# Altium PCB DataAcquisitonBoard.PcbDoc
Units mm, origin at the board's own origin, x right, y up, seen from the top; angles counter-clockwise.
Board outline 100 x 100 mm, 2 copper layers (Top Layer, Bottom Layer); 73 components, 56 nets, 233 pads, 66 vias.
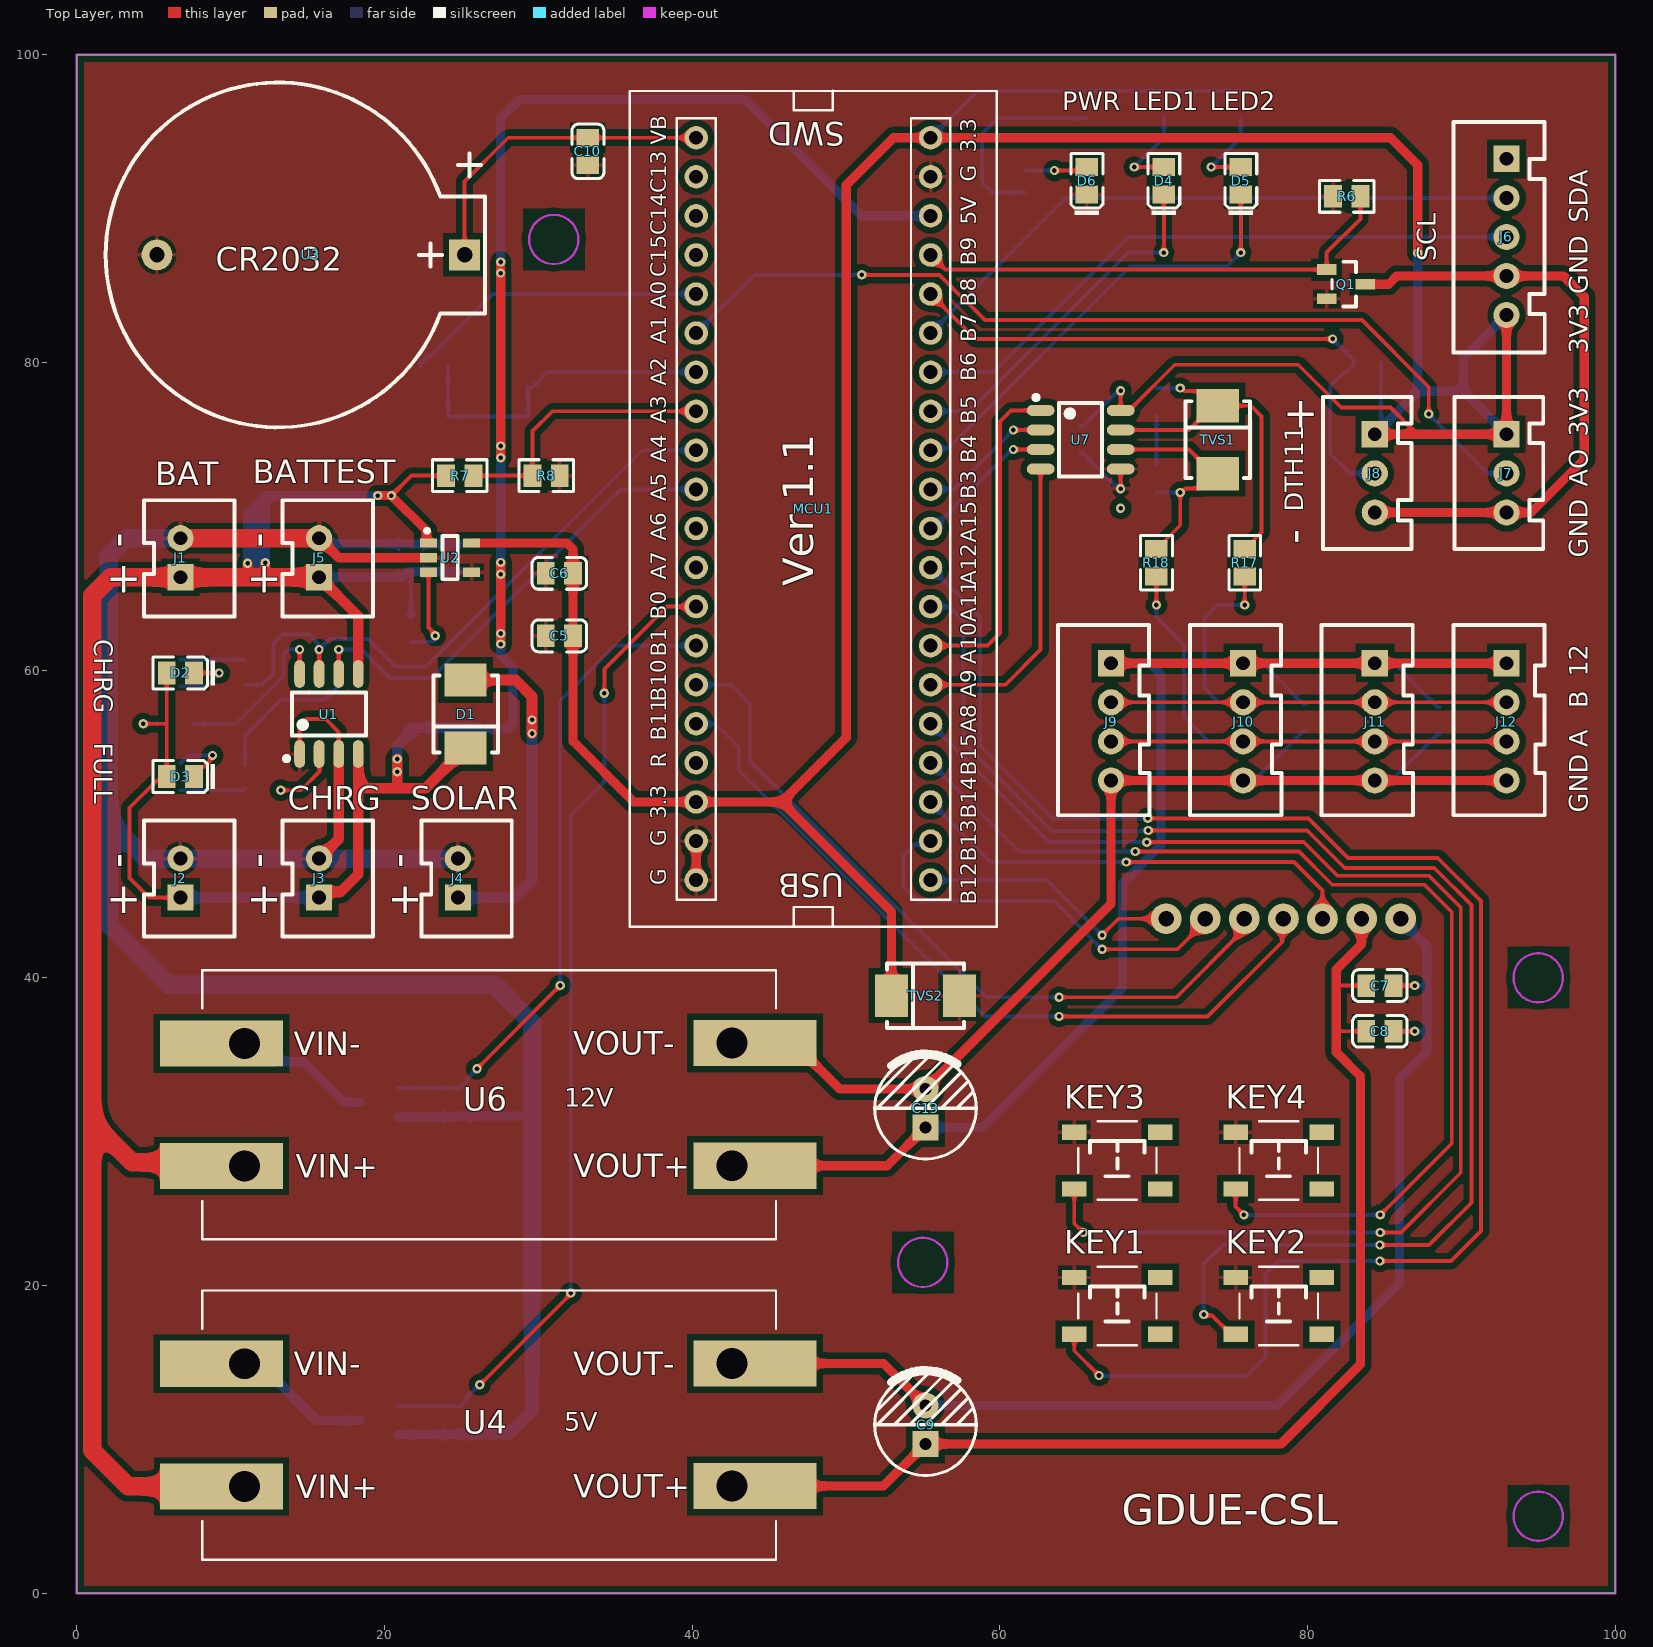
[diagram p0: Top Layer view]
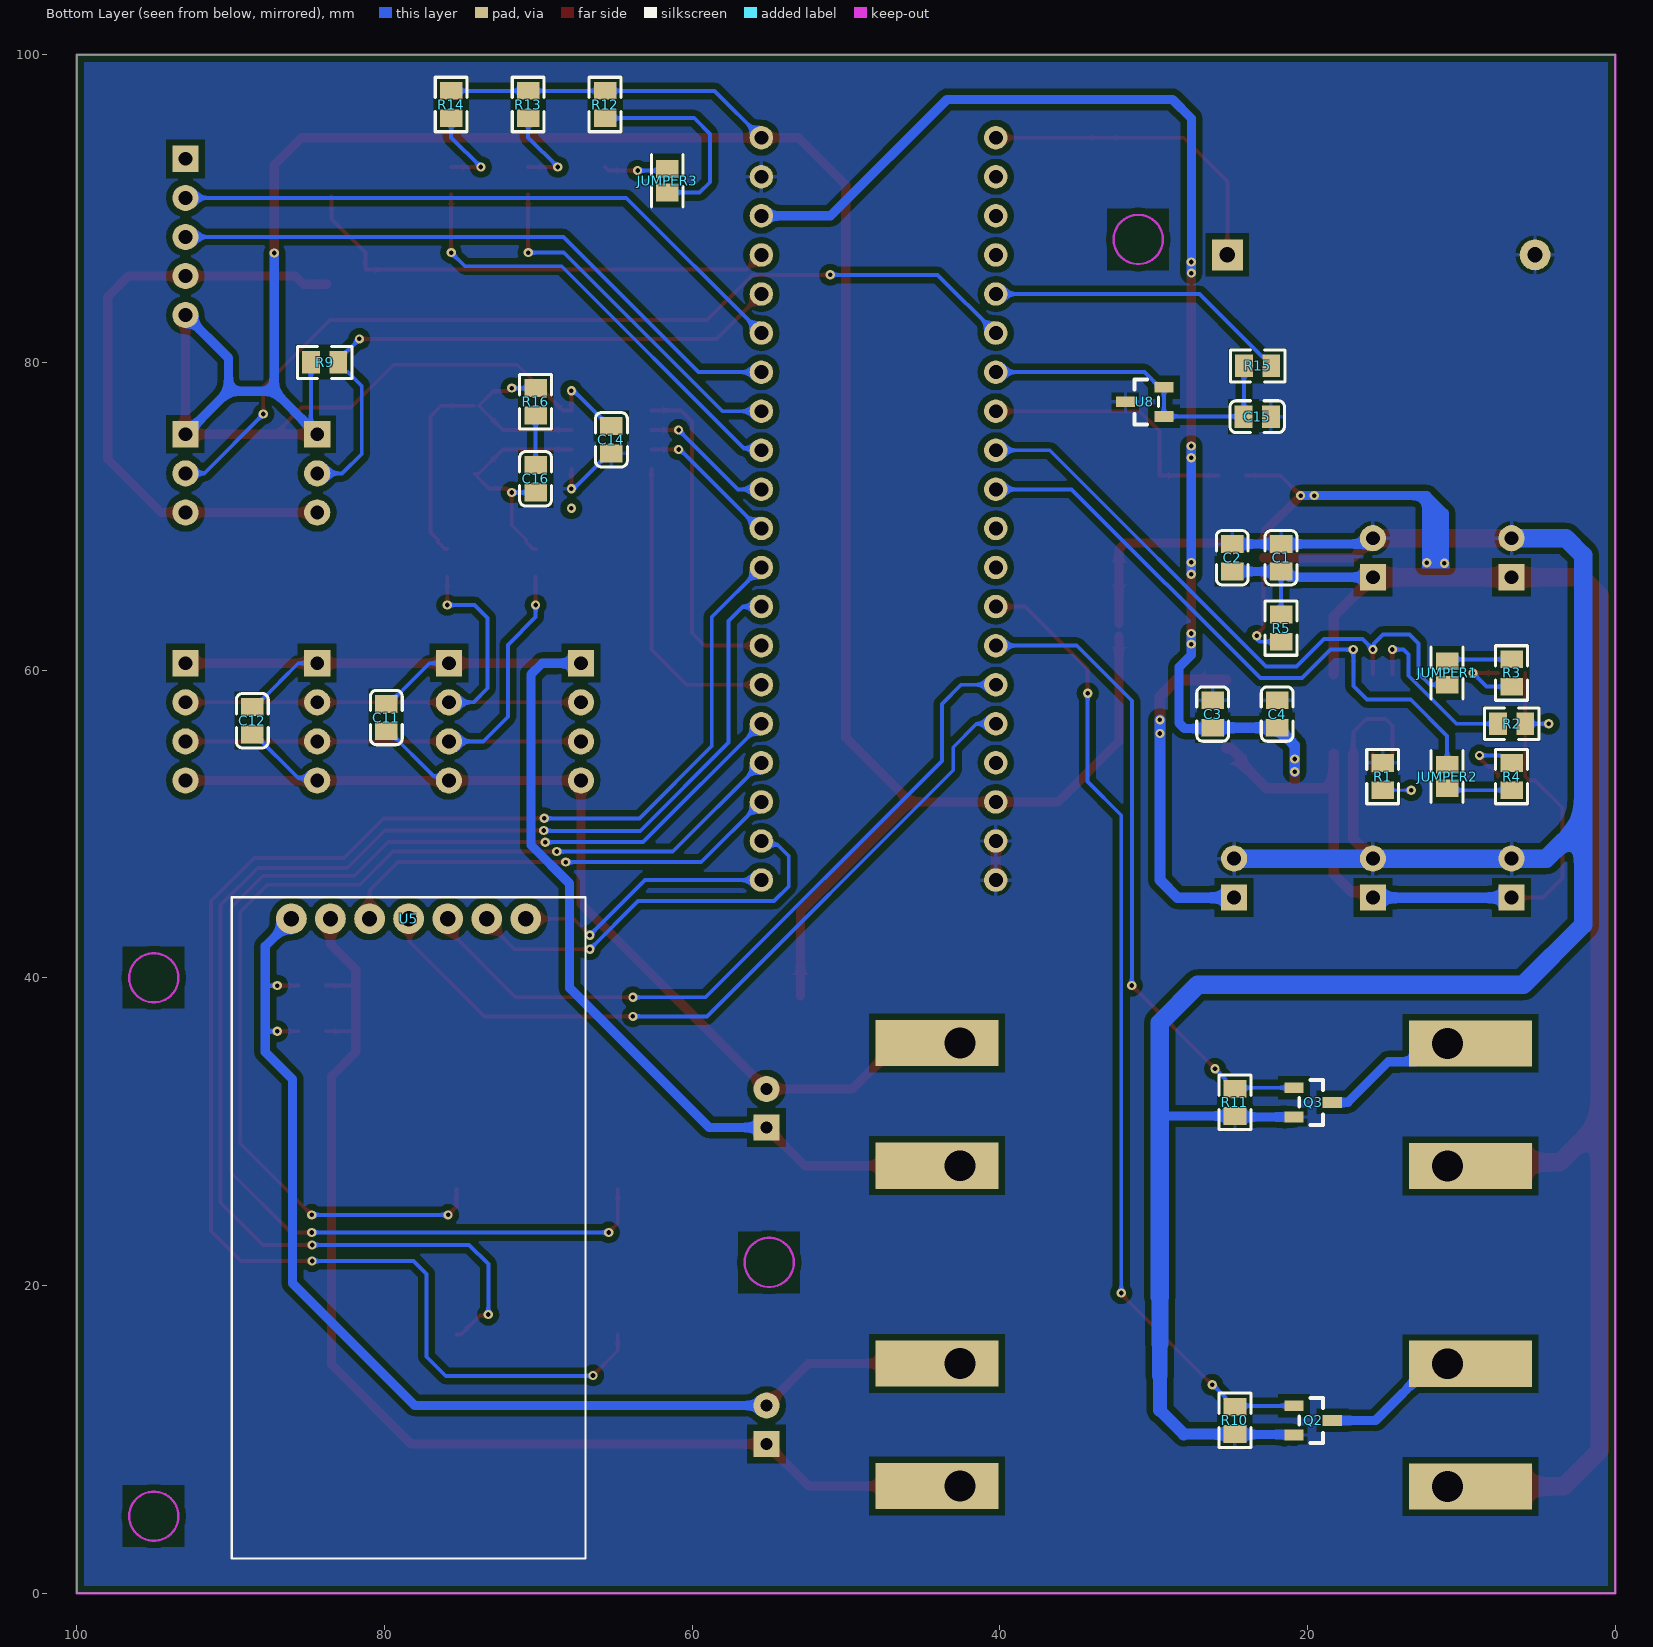
[diagram p1: Bottom Layer view, seen from below]
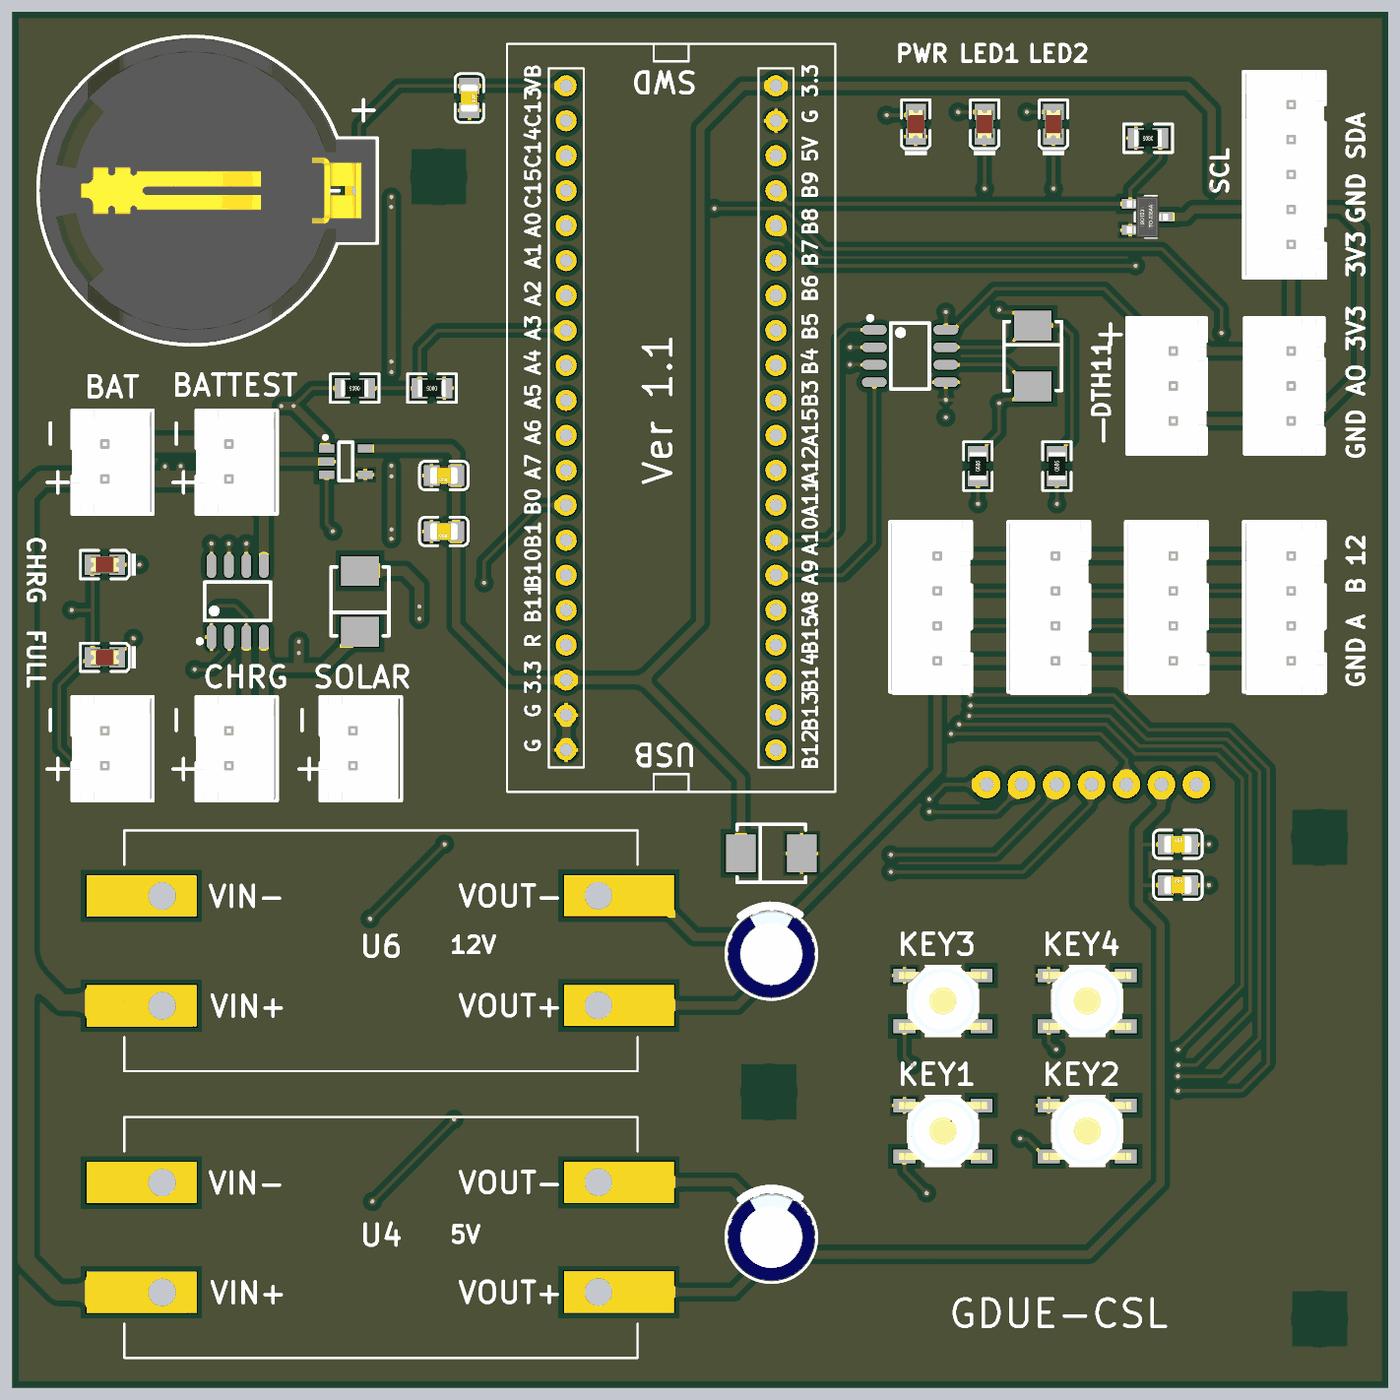
[diagram p2: 3D render of the assembled board from above, using the file's embedded part models]
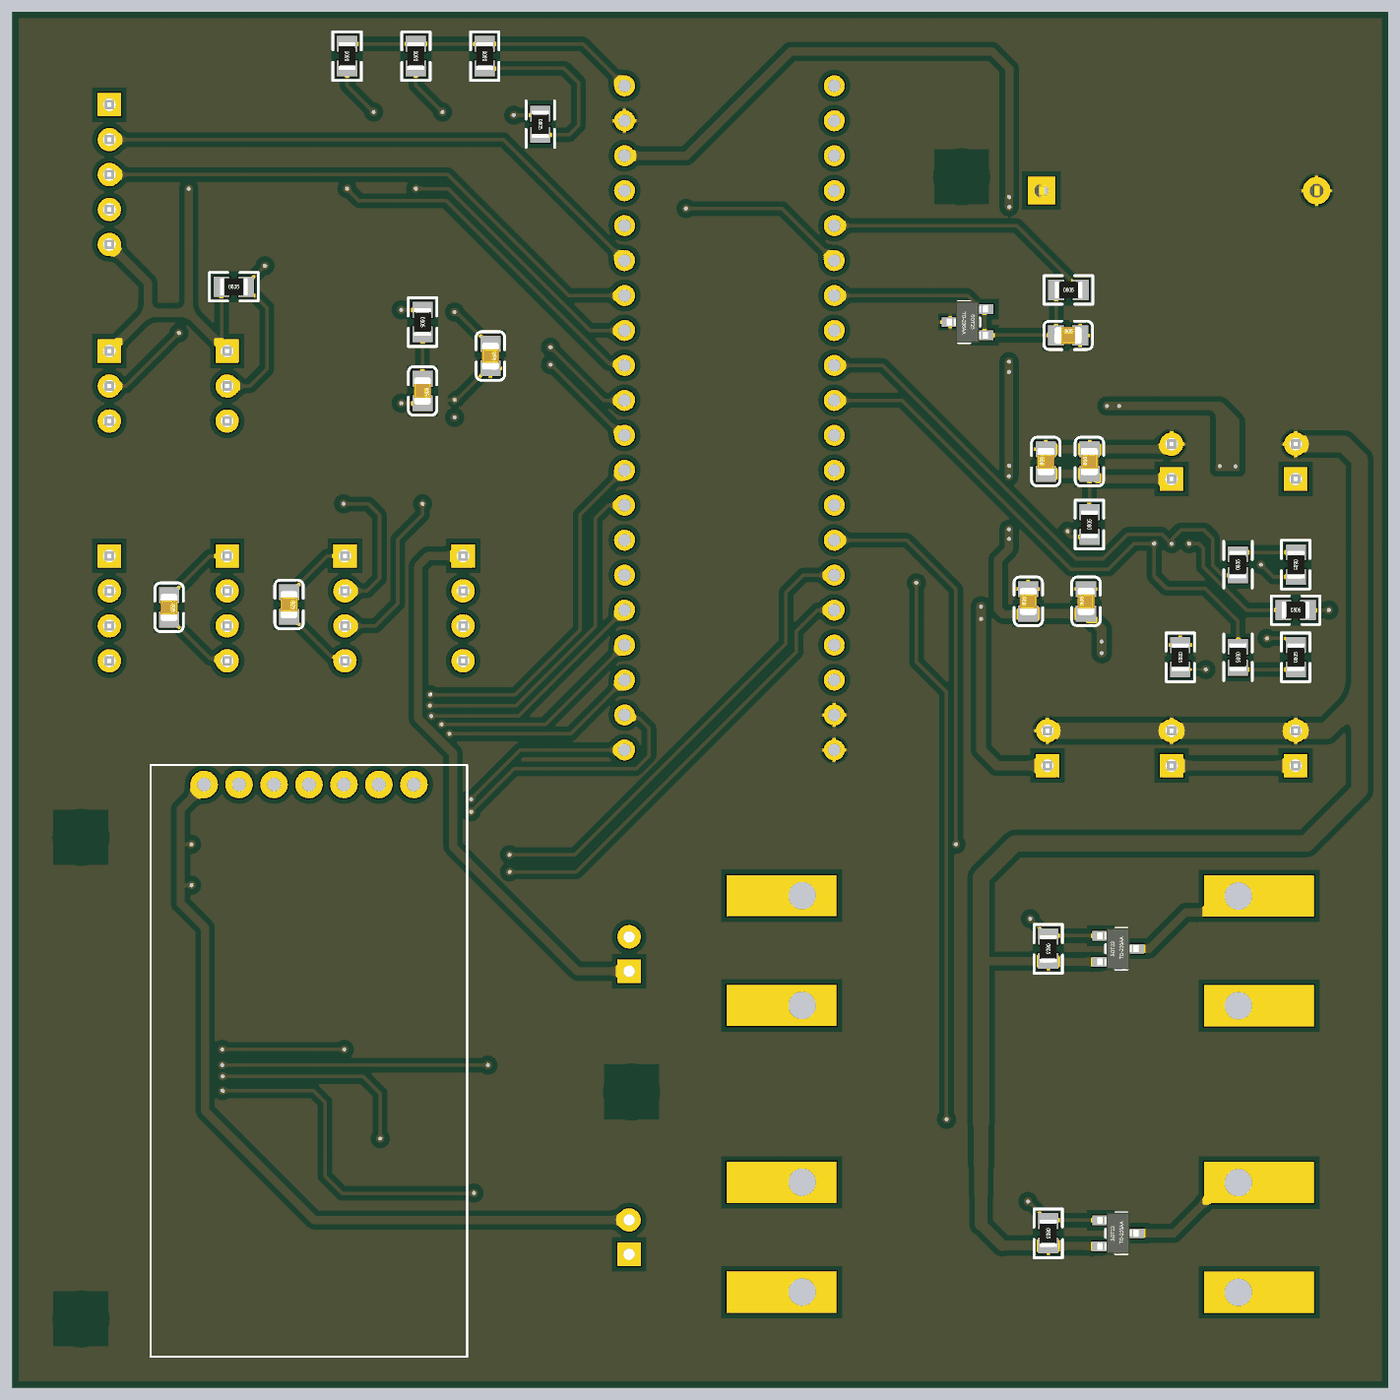
[diagram p3: 3D render of the assembled board from below, using the file's embedded part models]

## Layer stack, top to bottom
Top Solder: solder mask 0.0102, Solder Resist, Dk 3.5
Top Layer: signal copper 0.0356
Dielectric 1: dielectric 0.32, FR-4, Dk 4.8
Bottom Layer: signal copper 0.0356
Bottom Solder: solder mask 0.0102, Solder Resist, Dk 3.5

## Board outline
0,0 100,0 100,100 0,100

## Design rules (kind name [scope] priority, off if disabled: settings)
BoardOutlineClearance [All] p1: gap=0.4 ignorepadtopadclearanceinfootprint=FALSE
Clearance PolyClearance [InPolygon] p1: gap=0.4 ignorepadtopadclearanceinfootprint=FALSE
Clearance [All] p2: gap=0.152 ignorepadtopadclearanceinfootprint=FALSE
Height [All] p1: minheight=0 maxheight=50 prefheight=12.7
HoleSize [All] p1: absolutevalues=TRUE maxlimit=6.35 minlimit=0.3 maxpercent=80.000 minpercent=20.000
HoleToHoleClearance [All] p1: gap=0.152 allowstackedmicrovias=TRUE
MinimumSolderMaskSliver MinimumSolderMaskSliver_SOT23-5 [HasFootprint('SOT-23-5')] p1: minsoldermaskwidth=0
MinimumSolderMaskSliver [All] p2: minsoldermaskwidth=0.152
PolygonConnect [All] p1: connectstyle=Relief reliefconductorwidth=0.254 reliefentries=4 polygonreliefangle="90 Angle" airgapwidth=0.254
RoutingVias [All] p1: holewidth=0.3 width=0.6 viastyle="Through Hole" minholewidth=0.3 minwidth=0.6 maxholewidth=3 maxwidth=5
SilkToSilkClearance [All] p1: silktosilkclearance=0
SilkToSolderMaskClearance [IsPad] p1: minsilkscreentomaskgap=0 clearancetoexposedcopper=TRUE
SolderMaskExpansion [All] p1: expansion=0.102
Width [All] p1: maxlimit=5 minlimit=0.152 preferedwidth=0.152
24 further rules are at their usual default settings.

## Components (designator, comment, footprint, x,y, rotation, side; value= is the part's Value field where it differs from the comment)
C1 "22u" 0805_C 21.717,67.31 r90 bottom
C2 "104" 0805_C 24.892,67.31 r90 bottom
C3 "22u" 0805_C 26.162,57.15 r90 bottom
C4 "104" 0805_C 21.971,57.15 r90 bottom
C5 "22u" 0805_C 31.369,62.23 r180 top
C6 "104" 0805_C 31.369,66.294 r180 top
C7 "0805,103" 0805_C 84.709,39.497 r0 top
C8 "0805,104" 0805_C 84.709,36.525 r0 top
C9 "100u" "CAP 2.5*6.3*11.2" 55.169,10.947 r90 top
C10 "0805,104" 0805_C 33.223,93.726 r270 top
C11 "0805,103" 0805_C 79.883,56.921 r270 bottom
C12 "0805,104" 0805_C 88.595,56.718 r270 bottom
C13 "100u" "CAP 2.5*6.3*11.2" 55.169,31.521 r90 top
C14 "0805,104" 0805_C 65.253,74.981 r270 bottom
C15 "0805,104" 0805_C 23.266,76.479 r180 bottom
C16 "0805,48n" 0805_C 70.18,72.441 r270 bottom
D1 "SS24" SMB(DO-214AA)_S1 25.273,57.15 r90 top
D2 "" 0805_LED_S1 6.731,59.817 r180 top
D3 "" 0805_LED_S1 6.731,53.086 r180 top
D4 "0805" 0805_LED_S1 70.663,91.821 r90 top
D5 "0805" 0805_LED_S1 75.667,91.821 r90 top
D6 "0805" 0805_LED_S1 65.659,91.821 r90 top
J1 "电池接口" XH2.54-LI-2P 6.731,67.31 r90 top
J2 "DC JACK" XH2.54-LI-2P 6.731,46.482 r90 top
J3 "DC JACK" XH2.54-LI-2P 15.748,46.482 r90 top
J4 "DC JACK" XH2.54-LI-2P 24.765,46.482 r90 top
J5 "电池测试接口" XH2.54-LI-2P 15.748,67.31 r90 top
J6 "TSL2561" XH2.54-LI-5P 92.939,88.163 r270 top
J7 "土壤湿度传感器" XH2.54-LI-3P 92.939,72.796 r270 top
J8 "DTH11" XH2.54-LI-3P 84.379,72.796 r270 top
J9 "12V_SENSOR" XH2.54-LI-4P 67.234,56.642 r270 top
J10 "12V_SENSOR" XH2.54-LI-4P 75.819,56.642 r270 top
J11 "12V_SENSOR" XH2.54-LI-4P 84.379,56.642 r270 top
J12 "12V_SENSOR" XH2.54-LI-4P 92.939,56.642 r270 top
JUMPER1 "0805_JUMPER" JUMPER 10.922,59.817 r90 bottom
JUMPER2 "0805_JUMPER" JUMPER 10.922,53.086 r270 bottom
JUMPER3 "0805_JUMPER" JUMPER 61.62,91.821 r270 bottom
KEY1 "KEY" "TSW SMD-4*4*1.5" 67.64,18.669 r0 top
KEY2 "KEY" "TSW SMD-4*4*1.5" 78.13,18.669 r0 top
KEY3 "KEY" "TSW SMD-4*4*1.5" 67.64,28.118 r0 top
KEY4 "KEY" "TSW SMD-4*4*1.5" 78.13,28.118 r0 top
MCU1 "市售的MCU核心板" STM32F103C8T6_CORE 47.879,70.485 r90 top
Q1 "AO3400" SOT-23(SOT-23-3) 82.499,85.09 r180 top
Q2 "AO3400" SOT-23(SOT-23-3) 19.634,11.227 r0 bottom
Q3 "AO3400" SOT-23(SOT-23-3) 19.634,31.902 r0 bottom
R1 "0805,1.1k" 0805_R 15.113,53.086 r270 bottom
R2 "0805,500k" 0805_R 6.731,56.515 r180 bottom
R3 "0805,1k" 0805_R 6.731,59.817 r270 bottom
R4 "0805,1k" 0805_R 6.731,53.086 r90 bottom
R5 "0805,100K" 0805_R 21.717,62.738 r90 bottom
R6 "0805,10K" 0805_R 82.55,90.805 r180 top
R7 "0805,50K" 0805_R 24.891,72.644 r180 top
R8 "0805,50K" 0805_R 30.505,72.644 r180 top
R9 "0805,5K" 0805_R 83.896,80.01 r180 bottom
R10 "0805,10K" 0805_R 24.714,11.227 r270 bottom
R11 "0805,10K" 0805_R 24.714,31.902 r270 bottom
R12 "0805,1k" 0805_R 65.659,96.774 r90 bottom
R13 "0805,1k" 0805_R 70.663,96.774 r90 bottom
R14 "0805,1k" 0805_R 75.667,96.774 r90 bottom
R15 "0805,330" 0805_R 23.24,79.781 r180 bottom
R16 "0805,120" 0805_R 70.18,77.445 r270 bottom
R17 "0805,10" 0805_R 75.921,66.98 r90 top
R18 "0805,10" 0805_R 70.18,66.98 r90 top
TVS1 "SMBJ10CA" SMB(DO-214AA)_S1 74.168,74.981 r270 top
TVS2 "SMBJ5.0A" SMB(DO-214AA)_S1 55.169,38.837 r0 top
U1 "TP4056X" SOIC-8_150mil 16.383,57.15 r0 top
U2 "TPS78233" SOT-23-5 24.257,67.31 r180 top
U3 "CR2302" CR2032_A 13.081,86.995 r0 top
U4 "DCDC_BOOST" BOOSTER 26.797,10.922 r0 top
U5 "AS32TTL1W" LORA 78.435,23.749 r270 bottom
U6 "DCDC_BOOST" BOOSTER 26.797,31.75 r0 top
U7 "MAX3485" SOIC-8_150mil 65.253,74.981 r270 top
U8 "TL431" SOT-23(SOT-23-3) 30.582,77.445 r180 bottom

## Footprints (in the part's own frame and the unit in brackets; to place one, negate y for a bottom-side part, rotate by r counter-clockwise, add the part's x,y. Pads: shape width x height; smd on the part's side, far side on the other; paste and mask are expansions set on the pad)
0805_C [mm]
  rect 1.16x1.47 smd: 1(-0.89,0) 2(0.89,0)
  silkscreen extent -1.77,-1.04 1.77,1.04, body extent -1,-0.63 1,0.62, height 0.77
0805_LED_S1 [mm]
  rect 1.16x1.47 smd: A(0.89,0) K(-0.89,0)
  silkscreen extent -2.25,-1.04 1.77,1.03, body extent -1.01,-0.62 1.01,0.62, height 1.1
0805_R [mm]
  rect 1.16x1.47 smd: 1(-0.89,0) 2(0.89,0)
  silkscreen extent -1.77,-1.04 1.77,1.03, body extent -1,-0.63 1,0.62, height 0.49
BOOSTER [mm] "DCDC升压模块"
  rect 8x3 hole 2 copper offset -1.5,0: 1(-15.9,3.988) 2(-15.9,-3.988)
  rect 8x3 hole 2 copper offset 1.5,0: 3(15.799,-3.962) 4(15.799,4.013)
  silkscreen extent -18.65,-8.75 18.65,8.75
"CAP 2.5*6.3*11.2" [mm] "脚距2.5mm直径6.3mm高度11.2mm"
  rect 1.7x1.7 hole 0.8: 1(-1.25,0)
  round 1.7 hole 0.8: 2(1.25,0)
  silkscreen extent -3.3,-3.3 3.56,3.3, body extent -3.15,-3.15 3.16,3.15, height 11.23
CR2032_A [mm] "纽扣电池座"
  rect 2x2 hole 1: 1(12.126,0)
  round 2 hole 1: 2(-7.874,0)
  silkscreen extent -11.21,-11.21 13.46,11.21, body extent -11.1,-11.1 13.3,11.1, height 8.75
JUMPER [mm]
  rect 1.16x1.47 smd: 1(-0.762,0) 2(0.762,0)
  silkscreen extent -1.69,-1.04 1.69,1.03, body extent -1,-0.63 1,0.62, height 0.49
LORA [mm] "AS32-TTL-1W"
  round 2 hole 1: 1(-20.091,7.62) 2(-20.091,5.08) 3(-20.091,2.54) 4(-20.091,0) 5(-20.091,-2.54) 6(-20.091,-5.08) 7(-20.091,-7.62)
  silkscreen extent -21.5,-11.5 21.5,11.5
SMB(DO-214AA)_S1 [mm]
  rect 2.159x2.743 smd: 1(2.21,0) 2(-2.21,0)
  silkscreen extent -2.5,-2.1 2.5,2.1
SOIC-8_150mil [mm]
  oval 0.7x1.8 smd: 1(-1.905,-2.6) 2(-0.635,-2.6) 3(0.635,-2.6) 4(1.905,-2.6) 5(1.905,2.6) 6(0.635,2.6) 7(-0.635,2.6) 8(-1.905,2.6)
  silkscreen extent -2.9,-3.05 2.4,1.4
SOT-23(SOT-23-3) [mm]
  rect 1.25x0.7 smd: 1(1.25,-0.95) 2(1.25,0.95) 3(-1.25,0)
  silkscreen extent -0.65,-1.46 0.9,1.46, body extent -1.5,-1.5 1.5,1.5, height 1.3
SOT-23-5 [mm]
  rect 1.1x0.6 smd: 1(1.4,-0.95) 2(1.4,0) 3(1.4,0.95) 4(-1.4,0.95) 5(-1.4,-0.95)
  silkscreen extent -0.5,-1.87 1.62,1.4
STM32F103C8T6_CORE [mil] "STM32F103C8T6核心板"
  round 60 hole 35.43: 1(-950,300) 2(-850,300) 3(-750,300) 4(-650,300) 5(-550,300) 6(-450,300) 7(-350,300) 8(-250,300) 9(-150,300) 10(-50,300) 11(50,300) 12(150,300) 13(250,300) 14(350,300) 15(450,300) 16(550,300) 17(650,300) 18(750,300) 19(850,300) 20(950,300) 21(-950,-300) 22(-850,-300) 23(-750,-300) 24(-650,-300) 25(-550,-300) 26(-450,-300) 27(-350,-300) 28(-250,-300) 29(-150,-300) 30(-50,-300) 31(50,-300) 32(150,-300) 33(250,-300) 34(350,-300) 35(450,-300) 36(550,-300) 37(650,-300) 38(750,-300) 39(850,-300) 40(950,-300)
  silkscreen extent -1070,-470 1070,470
"TSW SMD-4*4*1.5" [mm] "轻触开关，长宽高：4*4*1.5mm"
  rect 1.6x1 smd: 1(-2.8,1.85) 2(-2.8,-1.85) 3(2.8,-1.85) 4(2.8,1.85)
  silkscreen extent -2.55,-2.55 2.55,2.55, body extent -3.2,-2.6 3.2,2.6, height 1.5
XH2.54-LI-2P [mm] "接插件，2P"
  rect 1.7x1.7 hole 0.9: 1(-1.27,0)
  round 1.7 hole 0.9: 2(1.27,0)
  silkscreen extent -3.81,-3.51 3.74,2.37, body extent -3.77,-3.3 3.77,2.4, height 7.05
XH2.54-LI-3P [mm] "接插件，3P"
  rect 1.7x1.7 hole 0.9: 1(-2.54,0)
  round 1.7 hole 0.9: 2(0,0) 3(2.54,0)
  silkscreen extent -4.95,-3.38 4.93,2.39, body extent -5.04,-3.3 5.04,2.4, height 7.03
XH2.54-LI-4P [mm] "接插件，4P"
  rect 1.7x1.7 hole 0.9: 1(-3.81,0)
  round 1.7 hole 0.9: 2(-1.27,0) 3(1.27,0) 4(3.81,0)
  silkscreen extent -6.3,-3.45 6.07,2.49, body extent -6.31,-3.3 6.31,2.4, height 7.03
XH2.54-LI-5P [mm] "接插件，5P"
  rect 1.7x1.7 hole 0.9: 1(-5.08,0)
  round 1.7 hole 0.9: 2(-2.54,0) 3(0,0) 4(2.54,0) 5(5.08,0)
  silkscreen extent -7.48,-3.45 7.52,2.49, body extent -7.58,-3.3 7.58,2.4, height 7.03

## Part data
C1 C2 C3 C4 C5 C6 C7 C8 C10 C11 C12 C14 C15 C16: library part C0805
C9 C13: library part C直插电解
D1: library part Diodo_214AA, "Diodo diode"
D2: library part "0805 红灯", "发光二极管", Package=0805, SuppliersPartNumber=C2295, ComponentLink1Description=供应商, ComponentLink1URL=http://www.szlcsc.com/product/details_2668.html, Supplier=LC
D3: library part "0805 翠绿", "发光二极管", Package=0805, SuppliersPartNumber=C2297, ComponentLink1Description=供应商, ComponentLink1URL=http://www.szlcsc.com/product/details_2670.html, Supplier=LC
D4 D6: library part "0805 红灯", "发光二极管", SuppliersPartNumber=C2295, ComponentLink1Description=供应商, ComponentLink1URL=http://www.szlcsc.com/product/details_2668.html, Package=0805, Supplier=LC
D5: library part "0805 蓝灯", "发光二极管", SuppliersPartNumber=C2293, ComponentLink1Description=供应商, ComponentLink1URL=http://www.szlcsc.com/product/details_2666.html, Package=0805, Supplier=LC
J1: library part BAT
J2 J3 J4: library part DCINPUT, "DC充电输入接口"
J5: library part BAT, "电池接口"
J6: "IIC总线光强传感器模块 已经集成IIC上拉电阻"
J7: library part 土壤湿度
J8: "数字式温湿度传感器"
J9 J10 J11 J12: "12V传感器接口 包括 12V GND 485"
JUMPER1 JUMPER2 JUMPER3: "0805大小的跳线", Package=0805, SuppliersPartNumber=C17477, ComponentLink1Description=供应商, ComponentLink1URL=http://www.szlcsc.com/product/details_18165.html, Supplier=LC
KEY1 KEY2 KEY3 KEY4: library part TSW_4x4-SMT, "Tact Switch"
MCU1: library part STM32F103C8T6_CORE
Q1 Q2 Q3: library part "AO3400A N道沟 X0YV1T SOT-23", "MOS(场效应管)", Package=SOT-23, SuppliersPartNumber=C20917, ComponentLink1Description=供应商, ComponentLink1URL=http://www.szlcsc.com/product/details_21629.html, Supplier=LC
R1 R2 R3 R4 R5 R6 R7 R8 R9 R10 R11 R12 R13 R14 R15 R16 R17 R18: library part R0805
TVS1: library part TVS_214AA_BI, "双向TVS 214AA封装"
TVS2: library part TVS_214AA, "TVS diode"
U1: "防反接锂电池充电管理IC"
U2: library part TPS782, "Regulator_SMT", BOM名称=¿Éµ÷É, 学习资源=www.ooocke.
U3: "CR2302 3V电池"
U5: library part LORA_AS32TTL1W, "1W LORA无线串口"
U7: "3.3V供电带关断485半双工收发器"
U8: library part TL431AIDBZR, "德州仪器TL431 非国产TL431"

## Via types
v1: diameter 0.6, hole 0.3, Top Layer to Bottom Layer, tented both sides, 66 vias

## Nets (pads, with @x,y where several pads share a name; then routed paths per layer and width w, separated by ;. In a path a pad name is that pad's centre, name@x,y a point inside that pad or via, vN(x,y) a via of type N, cw(c..) or ccw(c..) an arc to the next point about the centre after c; other vN are vias at no path point)
1/2_VBAT: MCU1.13 R7.1 R8.2 | length 17.9
  Top Layer w0.254: R7.1 R8.2 29.615,75.539 30.912,76.835 MCU1.13
3.3: C5.1 C6.1 C14.1 J6.5 J7.1 J8.1 MCU1.3 MCU1.40 R9.1 R12.2 R13.2 R14.2 TVS2.2 U2.5 U7.8 | length 231.1
  Top Layer w0.254: v1(67.853,78.172) U7.8 68.403,76.886 71.374,79.858 79.4,79.858 82.194,77.064 85.395,77.064 87.122,75.336
  Top Layer w0.6: U2.5 31.867,68.26 32.258,67.869 32.258,63.017 ; C5.1 32.259,55.371 36.195,51.435 MCU1.3 45.822,51.435 ; TVS2.2 52.959,44.298 45.822,51.435 ; J8.1 87.122,75.336 J7.1 J6.5 ; v1(87.173,87.122) 87.173,92.837 85.395,94.615 MCU1.40 53.086,94.615 50.013,91.542 50.013,55.626 45.822,51.435
  Bottom Layer w0.254: MCU1.40 58.548,97.664 R12.2 R13.2 R14.2 ; C14.1 65.408,75.871 67.643,78.106 67.786,78.106 v1(67.853,78.172) ; J8.1@84.786,75.744 R9.1
  Bottom Layer w0.6: J8.1 84.786,75.744 87.173,78.13 ; v1(87.173,87.122) 87.173,78.13 ; J7.1 90.145,78.13 ; J6.5 90.145,80.29 90.145,78.13 ; 87.173,78.13 90.145,78.13
3.3_SENSOR_GND: J6.4 J7.3 J8.3 Q1.3 | length 40.6
  Top Layer w0.6: Q1.3 85.274,85.09 85.808,85.623 J6.4 96.647,85.623 97.993,84.277 97.993,73.711 94.539,70.256 J7.3 J8.3
3.3PWR_SW: MCU1.37 Q1.1 R6.1 | length 31.8
  Top Layer w0.254: MCU1.37 56.454,86.04 Q1.1 81.249,87.142 83.44,89.333 R6.1
12PWR_SW: MCU1.7 Q3.1 R11.1 | length 42.3
  Top Layer w0.254: v1(26.01,34.087) v1(31.42,39.498)
  Bottom Layer w0.254: Q3.1 24.654,32.852 R11.1 24.869,32.792 25.322,33.245 25.322,33.4 v1(26.01,34.087) ; v1(31.42,39.498) 31.42,58.014 35.001,61.595 MCU1.7
12V_PWR: C11.1 C12.1 C13.1 J9.1 J10.1 J11.1 J12.1 U6.3 | length 91.4
  Top Layer w0.6: U6.3 52.685,27.788 C13.1 ; J9.1 J10.1 J11.1 J12.1
  Bottom Layer w0.254: J10.1 77.087,60.452 79.728,57.811 C11.1 ; J11.1 85.61,60.452 86.798,59.263 86.798,59.25 88.44,57.608 C12.1
  Bottom Layer w0.6: C13.1 58.897,30.271 67.97,39.345 67.97,46.126 70.485,48.641 70.485,59.715 69.748,60.452 J9.1
12VGNDA: Q3.3 U6.1 | length 9.1
  Bottom Layer w0.6: U6.1 11.733,35.738 12.933,34.538 14.738,34.538 17.374,31.902 Q3.3
12VGNDB: C11.2 C12.2 C13.2 J9.4 J10.4 J11.4 J12.4 U6.4 | length 75.4
  Top Layer w0.6: U6.4 46.596,35.763 49.588,32.771 C13.2 67.234,44.836 J9.4 J10.4 J11.4 J12.4
  Bottom Layer w0.254: J10.4 76.096,53.109 76.805,53.109 79.728,56.031 C11.2 ; J11.4 84.545,52.998 85.61,52.998 88.44,55.828 C12.2
485_DE: MCU1.30 U7.3 | length 9.3
  Top Layer w0.254: v1(60.884,74.346) U7.3
  Bottom Layer w0.254: MCU1.30 55.659,69.215 60.79,74.346 v1(60.884,74.346)
485_DI: MCU1.26 U7.4 | length 19.8
  Top Layer w0.254: MCU1.26 60.376,59.055 62.653,61.332 U7.4
485_RE: MCU1.31 U7.2 | length 8.8
  Top Layer w0.254: v1(60.884,75.616) U7.2
  Bottom Layer w0.254: MCU1.31 57.023,71.755 v1(60.884,75.616)
485_RO: MCU1.27 U7.1 | length 21.6
  Top Layer w0.254: MCU1.27 59.207,61.595 60.02,62.408 60.02,76.175 60.731,76.886 U7.1
485A: C16.2 R18.2 TVS1.1 U7.6 | length 15.9
  Top Layer w0.254: U7.6 72.301,74.346 73.876,72.771 TVS1.1 73.216,71.818 72.09,71.818 71.823,71.552 v1(71.73,71.552) 71.73,69.419 70.788,68.478 70.788,68.323 70.335,67.87 R18.2
  Bottom Layer w0.254: C16.2 v1(71.73,71.552) v1(71.73,71.552)
485A_O: J9.3 J10.3 J11.3 J12.3 R18.1 | length 40.1
  Top Layer w0.254: J9.3 J10.3 J11.3 J12.3 ; v1(70.18,64.237) R18.1
  Bottom Layer w0.254: v1(70.18,64.237) 70.18,63.449 71.984,61.646 71.984,56.972 73.584,55.372 J10.3
485B: R16.1 R17.2 TVS1.2 U7.7 | length 23.2
  Top Layer w0.254: U7.7 72.301,75.616 73.876,77.191 72.924,78.143 72.016,78.143 71.823,78.336 v1(71.73,78.336) ; TVS1.2 76.327,77.191 77.013,76.505 77.013,68.962 76.529,68.478 76.529,68.323 76.076,67.87 R17.2
  Bottom Layer w0.254: R16.1 v1@71.729,78.335
485B_O: J9.2 J10.2 J11.2 J12.2 R17.1 | length 38
  Top Layer w0.254: J9.2 J10.2 J11.2 J12.2 ; v1(75.921,64.237) R17.1
  Bottom Layer w0.254: J10.2 74.219,57.912 73.304,58.826 73.304,63.398 74.143,64.237 v1(75.921,64.237)
BAT+: C1.1 C2.1 J1.1 J5.1 R5.2 R7.2 U1.5 U2.1 U4.2 U6.2 | length 140.6
  Top Layer w0.254: v1(20.447,71.349) 21.742,72.644 R7.2
  Top Layer w0.6: 11.1,66.04 v1(11.1,66.954) ; 12.243,66.04 v1(12.243,66.98) ; v1(19.558,71.349) v1(20.447,71.349) 22.735,69.061 22.735,68.26 U2.1
  Top Layer w0.7: J5.1 18.288,63.5 U1.5
  Top Layer w1.2: U4.2 3.337,6.934 1,9.271 1,30.598 ; U6.2 10.658,28.001 3.597,28.001 1,30.598 ; J5.1 J1.1 2.194,66.04 1,64.846 1,30.598
  Bottom Layer w0.254: R5.2 C1.1
  Bottom Layer w0.6: v1(11.1,66.954) 11.1,70.206 12.243,71.349 ; v1(12.243,66.98) 12.243,71.349 ; J5.1 21.182,66.04 21.562,66.42 C1.1 C2.1 ; v1(20.447,71.349) 12.243,71.349
DTH11_DATA: J8.2 MCU1.36 R9.2 | length 39.5
  Top Layer w0.254: MCU1.36 58.42,81.534 v1(81.636,81.534)
  Bottom Layer w0.254: v1(81.636,81.534) 82.552,80.618 82.553,80.618 83.006,80.165 R9.2 83.006,79.855 82.553,79.402 82.398,79.402 81.483,78.487 81.483,74.066 82.753,72.796 J8.2
GND: C1.2 C2.2 C3.2 C4.2 C5.2 C6.2 C10.2 C14.2 C15.2 D6.K J1.2 J2.2 J3.2 J4.2 J5.2 KEY1.1 KEY2.1 KEY3.1 KEY4.1 MCU1.1 MCU1.2 MCU1.39 Q1.2 Q2.2 Q3.2 R1.1 R6.2 R8.1 R10.2 R11.2 TVS2.1 U1.1 U1.3 U2.2 U2.4 U3.2 U7.5 U8.3 | length 173.3
  Top Layer w0.254: U1.1 14.478,56.388 14.91,56.82 16.18,56.82 17.018,55.982 U1.3 ; v1(67.853,71.79) U7.5
  Top Layer w0.6: J5.2 17.018,67.31 U2.2 ; MCU1.1 MCU1.2
  Top Layer w0.7: J3.2 17.018,49.022 U1.3
  Top Layer w1.2: J1.2 J5.2
  Bottom Layer w0.254: C14.2 65.408,74.091 67.643,71.856 67.786,71.856 v1(67.853,71.79)
  Bottom Layer w0.6: J5.2@15.883,68.58 16.263,68.2 C1.2 C2.2 ; Q2.2 20.914,10.307 24.684,10.307 R10.2 ; Q3.2 24.654,30.952 R11.2 29.488,31.012 29.591,31.115
  Bottom Layer w0.7: R10.2 28.041,10.337
  Bottom Layer w0.8: 28.041,10.337 29.591,11.887
  Bottom Layer w0.9: 29.591,11.887 29.591,14.122
  Bottom Layer w1: 29.591,14.122 29.591,16.205
  Bottom Layer w1.1: 29.591,16.205 29.591,19.253
  Bottom Layer w1.2: J1.2 3.2,68.58 2.083,67.462 2.083,50.14 ; J5.2 J5.2@15.883,68.58 ; J4.2 J3.2 J2.2 4.47,47.752 2.083,50.14 ; 29.591,19.253 29.591,31.115 29.591,37.084 27.127,39.548 5.969,39.548 2.083,43.434 2.083,50.14
KEY1: KEY1.2 MCU1.29 | length 106.4
  Top Layer w0.254: KEY1.2 64.84,15.754 v1(66.446,14.148) ; v1(69.621,50.368) 80.061,50.368 82.626,47.803 88.468,47.803 91.288,44.983 91.288,23.546 89.332,21.59 v1(84.709,21.59)
  Bottom Layer w0.254: MCU1.29 58.725,63.449 58.725,55.067 63.424,50.368 v1(69.621,50.368) ; v1@66.446,14.122 76.022,14.122 77.267,15.367 77.267,20.752 78.105,21.59 v1(84.709,21.59)
KEY2: KEY2.2 MCU1.28 | length 92.1
  Top Layer w0.254: v1(69.647,49.581) 79.985,49.581 82.423,47.142 88.24,47.142 90.653,44.729 90.653,25.375 87.909,22.631 v1(84.709,22.631) ; v1(73.254,18.11) 73.32,18.044 73.805,18.044 75.03,16.819 KEY2.2
  Bottom Layer w0.254: MCU1.28 56.693,64.135 57.633,63.195 57.633,55.296 63.373,49.555 v1@69.647,49.555 ; v1(73.254,18.11) 73.254,21.387 74.498,22.631 v1(84.709,22.631)
KEY3: KEY3.2 MCU1.25 | length 85.9
  Top Layer w0.254: KEY3.2 64.84,24.034 v1(65.43,23.444) ; v1(69.545,48.819) 79.756,48.819 81.94,46.634 87.909,46.634 89.967,44.577 89.967,27.33 86.081,23.444 v1(84.734,23.444)
  Bottom Layer w0.254: MCU1.25 63.195,48.819 v1(69.545,48.819) ; v1(65.43,23.444) v1(84.734,23.444)
KEY4: KEY4.2 MCU1.24 | length 70.3
  Top Layer w0.254: v1(68.809,48.209) 79.451,48.209 81.61,46.05 87.605,46.05 89.383,44.272 89.383,29.235 v1(84.734,24.587) ; KEY4.2 75.33,25.127 v1(75.87,24.587)
  Bottom Layer w0.254: MCU1.24 61.265,48.209 v1(68.809,48.209) ; v1(75.87,24.587) v1(84.734,24.587)
LED1: D4.K MCU1.33 | length 23.2
  Top Layer w0.254: v1(70.663,87.147) D4.K
  Bottom Layer w0.254: MCU1.33 58.039,76.835 68.351,87.147 v1(70.663,87.147)
LED2: D5.K MCU1.32 | length 29.3
  Top Layer w0.254: v1(75.667,87.147) D5.K
  Bottom Layer w0.254: MCU1.32 55.626,74.422 56.642,74.422 68.478,86.258 74.778,86.258 v1(75.667,87.147)
LORA_AUX: MCU1.23 U5.5 | length 29.7
  Top Layer w0.254: v1(68.224,47.523) 79.121,47.523 80.975,45.669 U5.5
  Bottom Layer w0.254: MCU1.23 59.411,47.523 v1(68.224,47.523)
LORA_GNDA: Q2.3 U4.1 | length 9
  Bottom Layer w0.6: U4.1 11.897,14.91 15.58,11.227 Q2.3
LORA_GNDB: C7.2 C8.2 C9.2 U4.4 U5.7 | length 77.3
  Top Layer w0.254: C8.2 v1(86.97,36.525) ; C7.2 v1(86.97,39.497)
  Top Layer w0.6: U4.4 52.431,14.935 C9.2
  Bottom Layer w0.254: v1(86.97,36.525) 87.757,36.525 ; v1(86.97,39.497) 87.732,39.497 87.757,39.472
  Bottom Layer w0.6: C9.2 78.034,12.197 85.979,20.142 85.979,33.401 87.757,35.179 87.757,36.525 87.757,39.472 87.757,42.062 U5.7@85.979,43.84
LORA_MD0: MCU1.21 U5.1 | length 17.2
  Top Layer w0.254: v1(66.65,42.774) 67.716,43.84 U5.1
  Bottom Layer w0.254: MCU1.21 63.068,46.355 v1(66.65,42.774)
LORA_MD1: MCU1.22 U5.2 | length 26.4
  Top Layer w0.254: v1(66.65,41.859) 71.552,41.859 73.355,43.663 U5.2
  Bottom Layer w0.254: MCU1.22 55.256,48.652 54.443,48.652 53.721,47.93 53.721,45.949 54.686,44.983 63.525,44.983 v1(66.65,41.859)
LORA_PWR: C7.1 C8.1 C9.1 U4.3 U5.6 | length 78.4
  Top Layer w0.254: 81.864,36.474 81.915,36.525 C8.1 ; 81.864,39.548 81.915,39.497 C7.1
  Top Layer w0.6: U4.3 52.431,6.96 C9.1 78.277,9.697 83.439,14.859 83.439,33.604 81.864,35.179 81.864,36.474 81.864,39.548 81.864,40.538 83.515,42.189 83.515,43.764 U5.6@83.439,43.84
LORA_RXD: MCU1.6 U5.3 | length 48.7
  Top Layer w0.254: v1(63.856,38.735) 71.476,38.735 75.819,43.078 U5.3@75.819,43.84
  Bottom Layer w0.254: MCU1.6 42.52,59.055 43.764,57.81 43.764,54.102 59.131,38.735 v1(63.856,38.735)
LORA_TXD: MCU1.5 U5.4 | length 50.4
  Top Layer w0.254: v1(63.856,37.49) 73.508,37.49 78.359,42.342 U5.4@78.359,43.84
  Bottom Layer w0.254: MCU1.5 41.504,56.515 43.028,54.991 43.028,53.492 59.03,37.49 v1(63.856,37.49)
LORAPWR_SW: MCU1.8 Q2.1 R10.1 | length 63.5
  Top Layer w0.254: v1(26.187,13.538) 32.106,19.456 v1(32.106,19.508) ; v1(34.29,58.496) 34.29,60.071 38.354,64.135 MCU1.8
  Bottom Layer w0.254: Q2.1 24.654,12.177 R10.1 24.869,12.117 25.322,12.57 25.322,12.725 26.136,13.538 v1(26.187,13.538) ; v1(32.106,19.508) 32.106,50.571 34.29,52.756 v1(34.29,58.496)
NetC16_1: C16.1 R16.2 | length 3.2
  Bottom Layer w0.254: C16.1 R16.2
NetD1_1: D1.1 J4.1 | length 22.9
  Top Layer w0.7: D1.1 28.524,59.36 29.591,58.293 v1(29.591,56.769) v1(29.591,55.88)
  Bottom Layer w0.7: J4.1 28.448,45.212 29.591,46.355 v1(29.591,55.88) v1(29.591,56.769)
NetD2_K: D2.K R3.2 | length 4.5
  Top Layer w0.254: D2.K v1(9.246,59.817)
  Bottom Layer w0.254: R3.2 8.356,58.927 v1(9.246,59.817)
NetD3_K: D3.K R4.2 | length 4.2
  Top Layer w0.254: D3.K 7.621,53.241 8.074,53.694 8.229,53.694 8.748,54.213 8.748,54.391 v1(8.814,54.458)
  Bottom Layer w0.254: R4.2 7.184,54.429 7.459,54.429 7.488,54.458 v1@8.788,54.458
NetD4_A: D4.A R13.1 | length 6
  Top Layer w0.254: v1(68.733,92.711) v1(68.733,92.711) D4.A D4.A@70.612,92.762
  Bottom Layer w0.254: v1(68.733,92.711) 70.663,94.64 R13.1
NetD5_A: D5.A R14.1 | length 5.9
  Top Layer w0.254: v1(73.737,92.711) D5.A
  Bottom Layer w0.254: v1(73.737,92.711) 75.667,94.64 R14.1
NetD6_A: D6.A JUMPER3.1 | length 4.2
  Top Layer w0.254: v1(63.551,92.481) 65.429,92.481 D6.A
  Bottom Layer w0.254: JUMPER3.1 61.722,92.481 v1(63.551,92.481)
NetJUMPER1_2: JUMPER1.2 R3.1 | length 4.2
  Bottom Layer w0.254: R3.1 10.794,60.707 JUMPER1.2
NetJUMPER2_2: JUMPER2.2 R4.1 | length 4.2
  Bottom Layer w0.254: R4.1 10.794,52.196 JUMPER2.2
NetJUMPER3_2: JUMPER3.2 R12.1 | length 13.4
  Bottom Layer w0.254: JUMPER3.2 59.512,91.059 58.852,91.719 58.852,94.869 59.867,95.884 R12.1
NetR1_2: R1.2 U1.2 | length 6
  Top Layer w0.254: v1(13.259,52.197) 14.554,52.197 15.773,53.416 15.773,54.525 U1.2
  Bottom Layer w0.152: v1(13.259,52.197) 13.462,52.197 13.463,52.196 R1.2
NetR5_1: R5.1 U2.3 | length 6.6
  Top Layer w0.254: U2.3@23.107,66.36 U2.3 22.857,62.764 23.302,62.319 v1(23.302,62.245)
  Bottom Layer w0.254: R5.1 23.113,61.848 23.444,62.179 23.378,62.245 v1(23.302,62.245)
Soil_Moisture_OUT: J7.2 MCU1.15 | length 60.6
  Top Layer w0.254: v1(51.029,85.7) 56.083,85.7 59.03,82.753 83.541,82.753 87.884,78.41 v1(87.884,76.657)
  Bottom Layer w0.254: MCU1.15 44.044,85.7 v1(51.029,85.7) ; v1@87.859,76.657 91.719,72.796 J7.2
TL431_PWR: MCU1.16 R15.2 | length 19.9
  Bottom Layer w0.254: R15.2 22.35,79.936 22.803,80.389 22.958,80.389 27.024,84.455 MCU1.16
TP4056_CE: R2.1 U1.8 | length 11.3
  Top Layer w0.254: U1.8 v1(14.478,61.341)
  Bottom Layer w0.254: R2.1 10.312,56.515 13.437,59.639 13.437,61.011 13.767,61.341 v1(14.478,61.341)
TP4056_CHRG: JUMPER1.1 MCU1.12 U1.7 | length 40.9
  Top Layer w0.254: U1.7 v1(15.748,61.341)
  Bottom Layer w0.254: JUMPER1.1 12.04,59.055 12.776,59.792 12.776,61.747 13.36,62.332 15.088,62.332 15.686,61.734 15.686,61.403 v1(15.748,61.341) 16.434,62.027 18.923,62.027 20.701,60.249 22.708,60.249 36.754,74.295 MCU1.12
TP4056_STBY: JUMPER2.1 MCU1.11 U1.6 | length 42.4
  Top Layer w0.254: U1.6 v1(17.018,61.341)
  Bottom Layer w0.254: JUMPER2.1 10.922,55.728 13.284,58.09 16.129,58.09 17.018,58.979 v1(17.018,61.341) 18.491,61.341 20.345,59.487 23.063,59.487 35.331,71.755 MCU1.11
TSL2561_SCL: J6.3 MCU1.34 | length 41.1
  Bottom Layer w0.254: MCU1.34 59.588,79.375 68.377,88.163 J6.3
TSL2561_SDA: J6.2 MCU1.35 | length 41.1
  Bottom Layer w0.254: MCU1.35 64.287,90.703 J6.2
VBACKUPBAT: C10.1 MCU1.20 U3.1 | length 21
  Top Layer w0.254: U3.1 25.207,91.78 28.043,94.616 C10.1 C10.1 MCU1.20
VCC_IN: C3.1 C4.1 D1.2 D2.A D3.A J2.1 J3.1 MCU1.38 R2.2 U1.4 | length 136
  Top Layer w0.254: v1(4.318,56.515) 5.777,56.515 5.841,56.451 ; D2.A 5.841,56.451 ; J2.1 4.699,45.212 3.429,46.482 3.429,51.054 5.207,52.832 5.587,52.832 D3.A 5.841,56.451
  Top Layer w0.6: v1(27.546,85.814) 27.546,86.525 v1(27.559,86.538) ; v1(27.559,61.697) v1(27.559,62.382) v1(27.559,66.243) v1(27.559,67.005) ; v1(27.559,73.812) v1(27.559,74.574) v1@27.559,85.814
  Top Layer w0.7: J3.1 16.132,45.596 17.148,45.596 18.288,46.736 18.288,52.832 ; U1.4 18.288,52.832 ; v1(20.828,54.229) 20.828,52.426 20.726,52.324 ; D1.2 24.981,54.94 24.251,54.211 24.251,53.919 22.657,52.324 20.726,52.324 ; 18.288,52.832 18.796,52.324 20.726,52.324
  Bottom Layer w0.254: v1(4.318,56.515) R2.2
  Bottom Layer w0.6: C3.1 26.212,56.21 27.995,56.21 28.346,56.562 28.346,60.198 27.559,60.985 v1(27.559,61.697) v1(27.559,62.382) ; v1(27.546,85.814) 27.559,85.827 v1(27.559,86.538) ; v1@27.546,86.538 27.546,95.872 28.778,97.104 43.434,97.104 51.003,89.535 MCU1.38 ; v1(27.559,66.243) v1(27.559,67.005) v1(27.559,73.812) v1(27.559,74.574)
  Bottom Layer w0.7: J2.1 J3.1 ; v1(20.828,53.391) v1(20.828,54.229) 20.828,55.117 21.586,55.875 21.586,56.03 21.816,56.26 C4.1 C3.1
VREF: C15.1 MCU1.14 R15.1 U8.1 U8.2 | length 21.7
  Bottom Layer w0.254: R15.1 24.13,76.506 C15.1 24.172,76.495 U8.1 U8.2 29.607,78.395 30.587,79.375 MCU1.14
pads on no net: J6.1 KEY1.3 KEY1.4 KEY2.3 KEY2.4 KEY3.3 KEY3.4 KEY4.3 KEY4.4 MCU1.4 MCU1.9 MCU1.10 MCU1.17 MCU1.18 MCU1.19
copper on no net:
  other v1: 67.853,70.52

## Polygon pours and split planes (outlines as drawn)
GND on Top Layer "GND_L01_P000" (solid, pour order 0): 0,0 100,0 100,100 0,100
GND on Bottom Layer "GND_L02_P001" (solid, pour order 1): 0,0 100,0 100,100 0,100

## Keep-outs
Keep-Out Layer:
  circle w0.152: c31,88 r1.6
  circle w0.152: c54.991,21.5 r1.6
  circle w0.152: c95,40 r1.6
  circle w0.152: c95,5 r1.6
  lines w0.152: 0,0 100,0 100,100 0,100 0,0

## Other copper
Top Layer:
  pour cut-out: 29.007,90.007 33.007,90.007 33.007,86.007 29.007,86.007
  pour cut-out: 52.998,23.507 56.998,23.507 56.998,19.507 52.998,19.507
  pour cut-out: 93.007,42.007 97.007,42.007 97.007,38.007 93.007,38.007
  pour cut-out: 93.007,7.007 97.007,7.007 97.007,3.007 93.007,3.007
Bottom Layer:
  pour cut-out: 29.007,90.007 33.007,90.007 33.007,86.007 29.007,86.007
  pour cut-out: 52.998,23.507 56.998,23.507 56.998,19.507 52.998,19.507
  pour cut-out: 93.007,42.007 97.007,42.007 97.007,38.007 93.007,38.007
  pour cut-out: 93.007,7.007 97.007,7.007 97.007,3.007 93.007,3.007
  region net BAT+: 10.795,66.624 12.522,66.624 12.548,66.65 12.548,67.031 10.82,67.031 10.795,67.005
  region: 10.795,66.624
  region net BAT+: 11.1,66.954 11.125,66.98 12.243,66.98 12.243,71.349 11.1,70.206
  region: 10.795,66.624

## Silkscreen, mask and mechanical layers (free items; w line width, h text height)
Top Overlay:
  pour cut-out: 93.13,12.573
  text "PWR" at 64.059,96.393 h1.2
  text "LED1" at 68.656,96.393 h1.2
  text "LED2" at 73.66,96.393 h1.2
  text "SDA" at 98.222,89.103 h1.2 r90
  text "SCL" at 88.341,86.589 h1.2 r90
  text "GND" at 98.222,84.455 h1.2 r90
  text "3V3" at 98.222,80.569 h1.2 r90
  text "+" at 78.41,75.768 h2
  text "3V3" at 98.222,75.184 h1.2 r90
  text "BATTEST" at 11.43,72.136 h1.52
  text "BAT" at 5.08,72.009 h1.52
  text "AO" at 98.222,71.933 h1.2 r90
  text "DTH11" at 79.731,70.307 h1.2 r90
  text "-" at 80.086,68.174 h2 r90
  text "-" at 3.556,67.945 h2 r90
  text "-" at 12.7,67.945 h2 r90
  text "GND" at 98.222,67.31 h1.2 r90
  text "Ver 1.1" at 47.879,65.456 h2 r90
  text "+" at 1.905,65.024 h2
  text "+" at 11.049,65.024 h2
  text "CHRG" at 1.143,62.027 h1.2 r270
  text "12" at 98.222,59.563 h1.2 r90
  text "B" at 98.222,57.531 h1.2 r90
  text "FULL" at 1.143,55.27 h1.2 r270
  text "A" at 98.222,54.991 h1.2 r90
  text "CHRG" at 13.716,50.927 h1.52
  text "SOLAR" at 21.717,50.927 h1.52
  text "GND" at 98.222,50.724 h1.2 r90
  text "-" at 3.556,47.117 h2 r90
  text "-" at 12.7,47.117 h2 r90
  text "-" at 21.844,47.117 h2 r90
  text "+" at 1.905,44.196 h2
  text "+" at 11.049,44.196 h2
  text "+" at 20.193,44.196 h2
  text "12V" at 31.674,31.623 h1.2
  text "5V" at 31.674,10.566 h1.2
  text "GDUE-CSL" at 67.92,4.445 h2
Drill Drawing:
  pour cut-out: 91.923,7.112

## Text inside footprints (layer, text, board x,y; h text height)
MCU1: Top Overlay "SWD" at 49.911,95.631 h1.52 r180; Top Overlay "USB" at 49.886,46.761 h1.52 r180; Top Overlay "G" at 38.329,46.025 h1.02 r90; Top Overlay "G" at 38.329,48.565 h1.02 r90; Top Overlay "3.3" at 38.329,50.317 h1.02 r90; Top Overlay "VB" at 38.329,94.158 h1.02 r90; Top Overlay "A7" at 38.329,65.888 h1.02 r90; Top Overlay "C15C14C13" at 38.329,85.547 h1.02 r90; Top Overlay "A6" at 38.329,68.428 h1.02 r90; Top Overlay "A5" at 38.329,70.993 h1.02 r90; Top Overlay "A4" at 38.329,73.482 h1.02 r90; Top Overlay "A3" at 38.329,76.008 h1.02 r90; Top Overlay "A2" at 38.329,78.493 h1.02 r90; Top Overlay "A1" at 38.329,81.204 h1.02 r90; Top Overlay "A0" at 38.329,83.464 h1.02 r90; Top Overlay "B0" at 38.329,63.271 h1.02 r90; Top Overlay "B1" at 38.329,60.858 h1.02 r90; Top Overlay "B10" at 38.329,57.937 h1.02 r90; Top Overlay "B11" at 38.329,55.423 h1.02 r90; Top Overlay "R" at 38.329,53.645 h1.02 r90; Top Overlay "3.3" at 58.471,93.65 h1.02 r90; Top Overlay "G" at 58.471,91.745 h1.02 r90; Top Overlay "5V" at 58.471,88.951 h1.02 r90; Top Overlay "B9" at 58.471,86.284 h1.02 r90; Top Overlay "B8" at 58.471,83.617 h1.02 r90; Top Overlay "B7" at 58.471,81.331 h1.02 r90; Top Overlay "B6" at 58.471,78.791 h1.02 r90; Top Overlay "B5" at 58.471,75.997 h1.02 r90; Top Overlay "B4" at 58.471,73.457 h1.02 r90; Top Overlay "B3" at 58.471,71.12 h1.02 r90; Top Overlay "A15" at 58.471,68.275 h1.02 r90; Top Overlay "A12" at 58.471,65.532 h1.02 r90; Top Overlay "A11" at 58.471,63.119 h1.02 r90; Top Overlay "A10" at 58.471,60.376 h1.02 r90; Top Overlay "A9" at 58.471,58.217 h1.02 r90; Top Overlay "A8" at 58.471,55.931 h1.02 r90; Top Overlay "B15" at 58.471,53.137 h1.02 r90; Top Overlay "B14" at 58.471,50.343 h1.02 r90; Top Overlay "B13" at 58.471,47.549 h1.02 r90; Top Overlay "B12" at 58.471,44.755 h1.02 r90
U3: Top Overlay "CR2032" at 9.017,85.979 h1.52
U4: Top Overlay "VIN-" at 14.097,14.148 h1.52; Top Overlay "VIN+" at 14.224,6.172 h1.52; Top Overlay "VOUT-" at 32.258,14.173 h1.52; Top Overlay "VOUT+" at 32.258,6.198 h1.52
U6: Top Overlay "VIN-" at 14.097,34.976 h1.52; Top Overlay "VIN+" at 14.224,27 h1.52; Top Overlay "VOUT-" at 32.258,35.001 h1.52; Top Overlay "VOUT+" at 32.258,27.026 h1.52